# Altium PCB FRDMShieldTemplateProject.PcbDoc
Units mil, origin at the board's own origin, x right, y up, seen from the top; angles counter-clockwise.
Board outline 1990 x 2100 mil, 2 copper layers (Top Layer, Bottom Layer); 4 components, 0 nets, 64 pads, 0 vias.
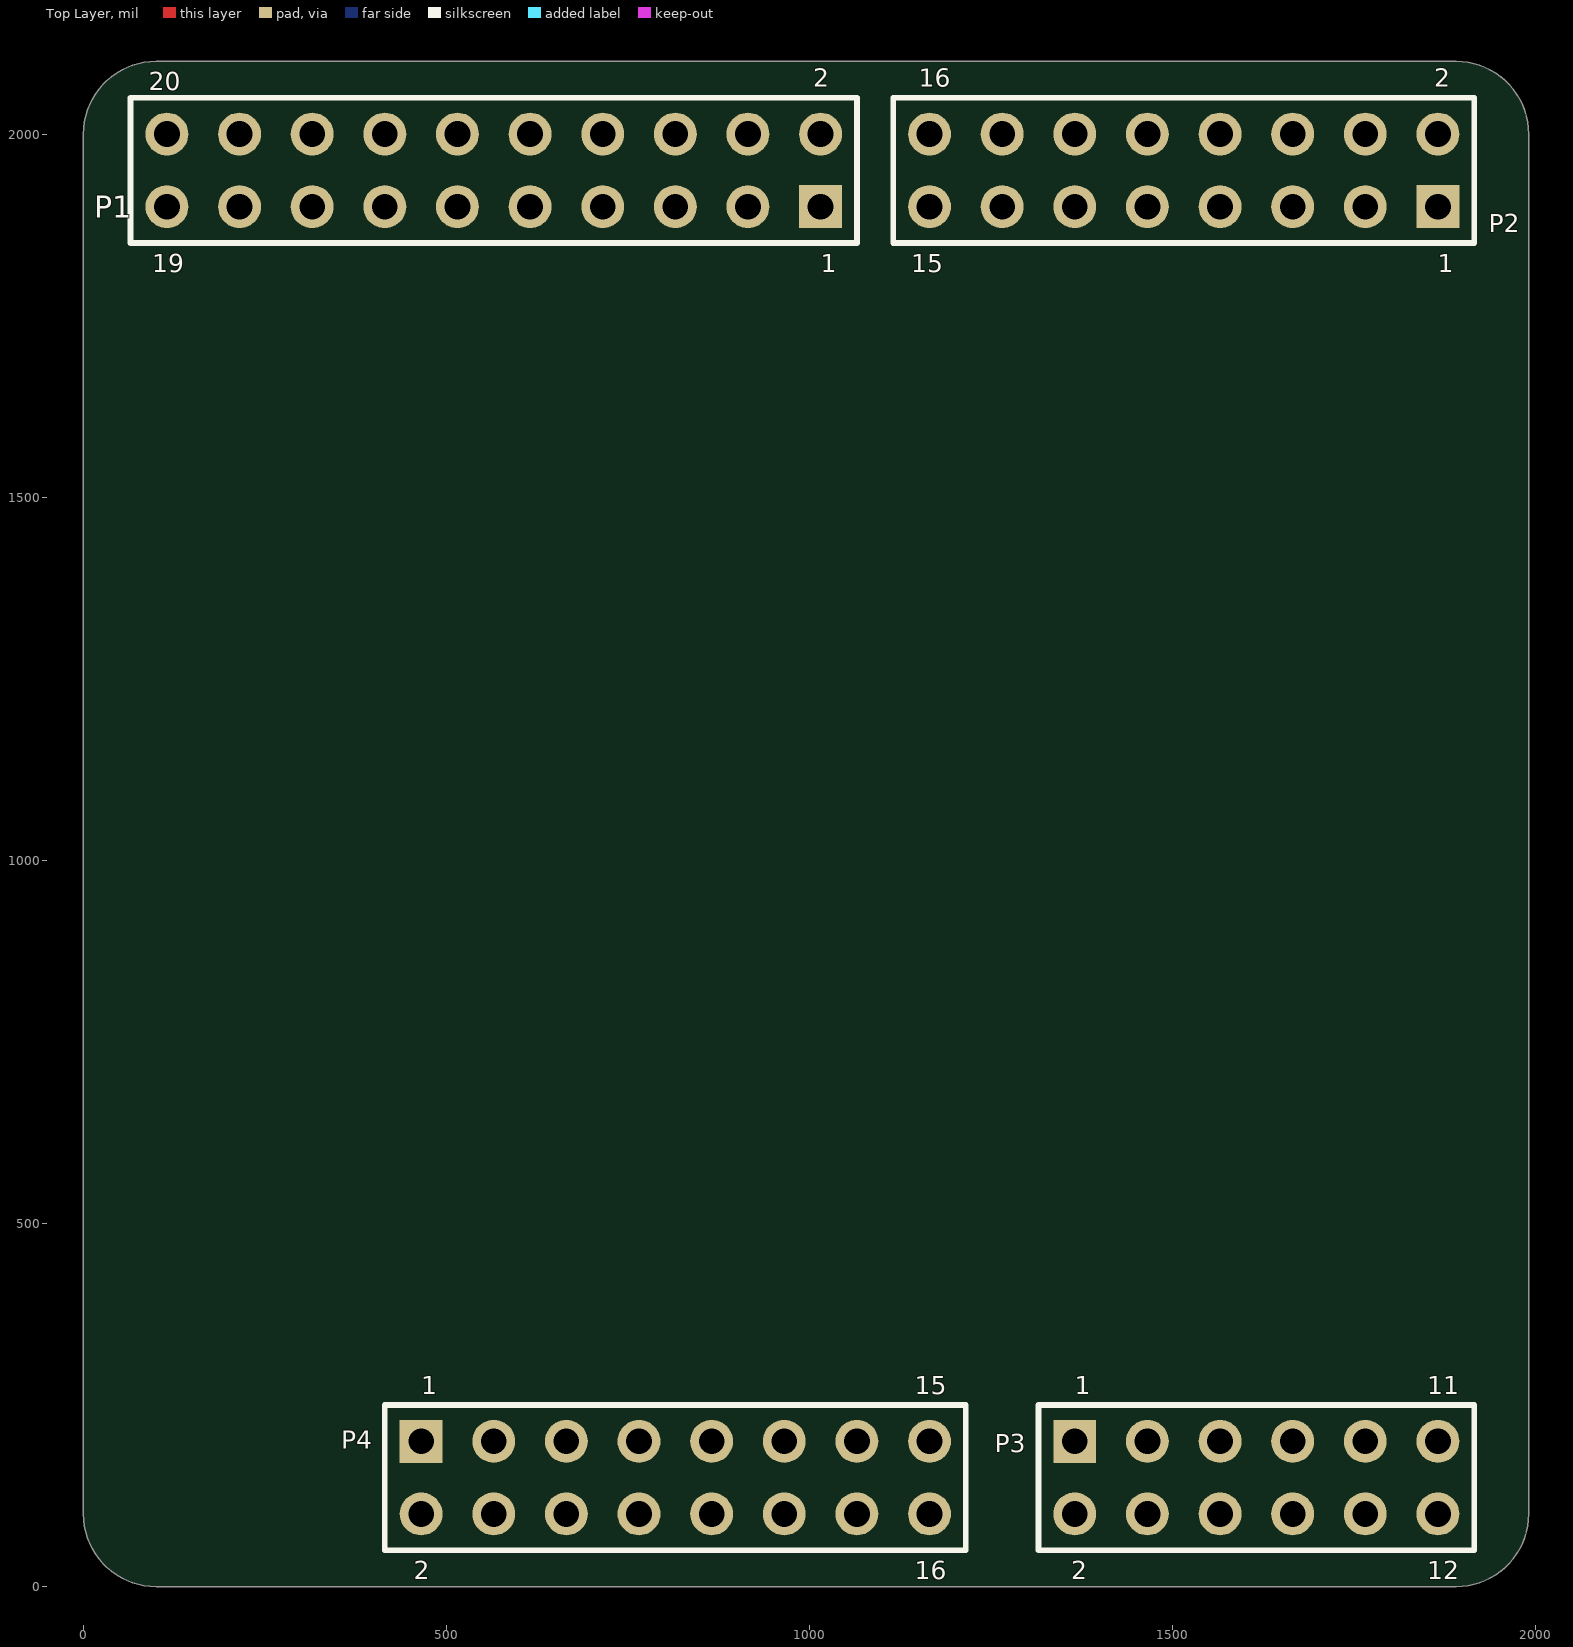
[diagram p0: Top Layer view]
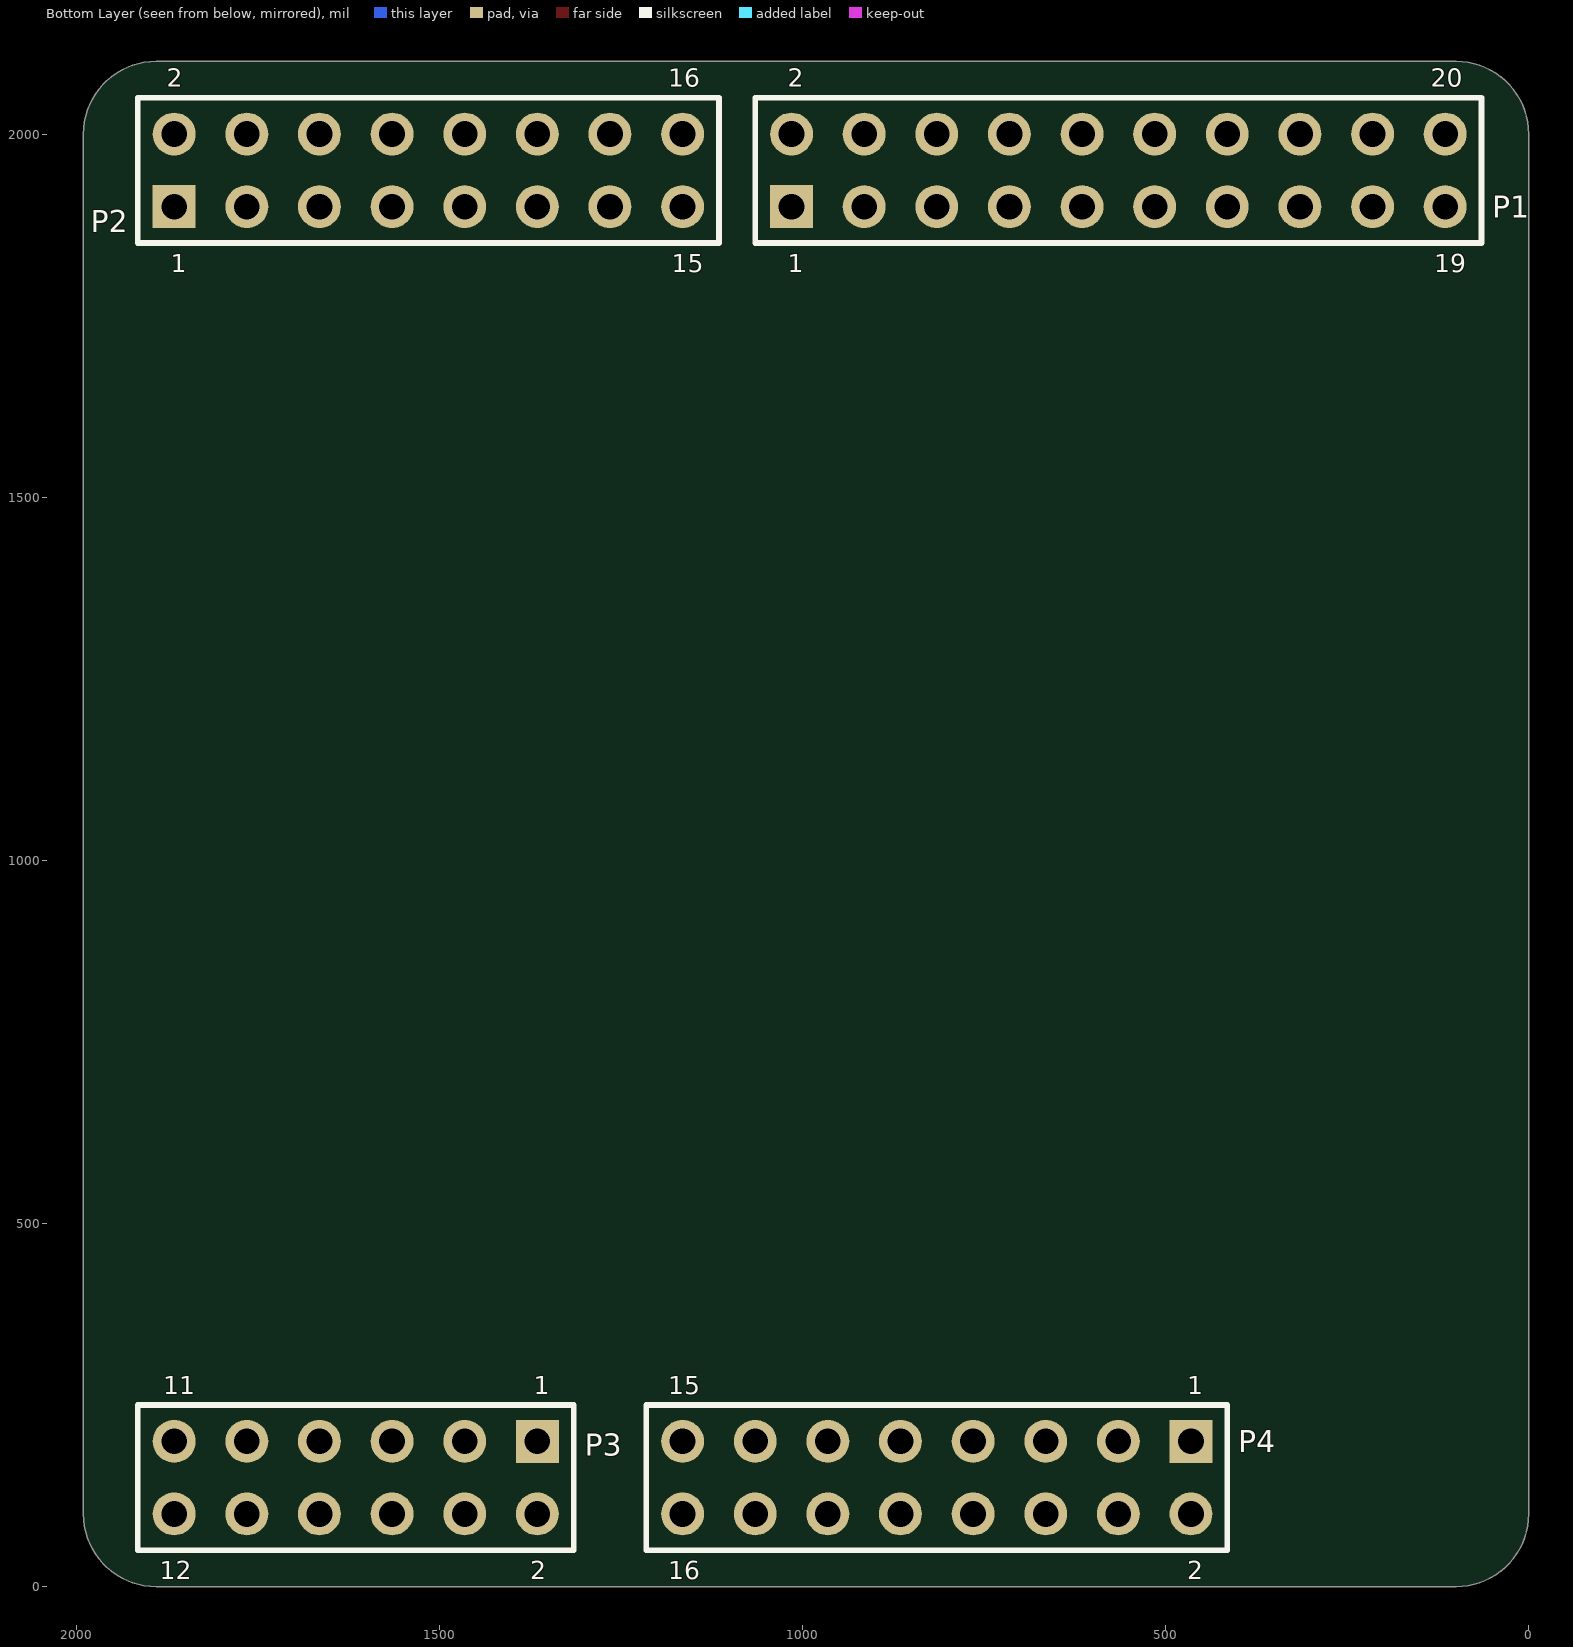
[diagram p1: Bottom Layer view, seen from below]

## Layer stack, top to bottom
Top Solder: solder mask 0.4, Solder Resist, Dk 3.5
Top Layer: signal copper 1.4
Dielectric 1: dielectric 12.6, FR-4, Dk 4.8
Bottom Layer: signal copper 1.4
Bottom Solder: solder mask 0.4, Solder Resist, Dk 3.5

## Board outline
0,1975 0,2000 cw(c100,2000) 100,2100 125,2100 1865,2100 1890,2100 cw(c1890,2000) 1990,2000 1990,1975 1990,125 1990,100 cw(c1890,100) 1890,0 1865,0 125,0 100,0 cw(c100,100) 0,100 0,125 0,1975

## Design rules (kind name [scope] priority, off if disabled: settings)
Clearance [All] p1: gap=6
HoleSize [All] p1: absolutevalues=TRUE maxlimit=125 minlimit=13 maxpercent=80.000 minpercent=20.000
MinimumSolderMaskSliver [All] p1: minsoldermaskwidth=1
PolygonConnect [All] p1: connectstyle=Relief reliefconductorwidth=10 reliefentries=4 polygonreliefangle="90 Angle" airgapwidth=10
RoutingVias [All] p1: holewidth=13 width=20 viastyle="Through Hole" minholewidth=13 minwidth=20 maxholewidth=125 maxwidth=250
SilkToSilkClearance [All] p1: silktosilkclearance=4
SilkToSolderMaskClearance [IsPad] p1: minsilkscreentomaskgap=6 clearancetoexposedcopper=TRUE
SolderMaskExpansion [All] p1: expansion=4
Width [All] p1: maxlimit=500 minlimit=6 preferedwidth=25
25 further rules are at their usual default settings.

## Components (designator, comment, footprint, x,y, rotation, side; value= is the part's Value field where it differs from the comment)
P1 "Header 10X2" HDR2X10 1015,1900 r180 bottom
P2 "" HDR2X8 1865,1900 r180 bottom
P3 "" HDR2X6 1365,200 r0 bottom
P4 "" HDR2X8 465,200 r0 bottom

## Footprints (in the part's own frame and the unit in brackets; to place one, negate y for a bottom-side part, rotate by r counter-clockwise, add the part's x,y. Pads: shape width x height; smd on the part's side, far side on the other; paste and mask are expansions set on the pad)
HDR2X6 [mm] "Connector; Header; 6x2 Position"
  rect 1.5x1.5 hole 0.9: 1(0,0)
  round 1.5 hole 0.9: 2(0,2.54) 3(2.54,0) 4(2.54,2.54) 5(5.08,0) 6(5.08,2.54) 7(7.62,0) 8(7.62,2.54) 9(10.16,0) 10(10.16,2.54) 11(12.7,0) 12(12.7,2.54)
  silkscreen extent -1.27,-1.27 13.97,3.81
HDR2X8 [mm] "Connector; Header; 8x2 Position"
  rect 1.5x1.5 hole 0.9: 1(0,0)
  round 1.5 hole 0.9: 2(0,2.54) 3(2.54,0) 4(2.54,2.54) 5(5.08,0) 6(5.08,2.54) 7(7.62,0) 8(7.62,2.54) 9(10.16,0) 10(10.16,2.54) 11(12.7,0) 12(12.7,2.54) 13(15.24,0) 14(15.24,2.54) 15(17.78,0) 16(17.78,2.54)
  silkscreen extent -1.27,-1.27 19.05,3.81
HDR2X10 [mm] "Connector; Header; 10x2 Position"
  rect 1.5x1.5 hole 0.9: 1(0,0)
  round 1.5 hole 0.9: 2(0,2.54) 3(2.54,0) 4(2.54,2.54) 5(5.08,0) 6(5.08,2.54) 7(7.62,0) 8(7.62,2.54) 9(10.16,0) 10(10.16,2.54) 11(12.7,0) 12(12.7,2.54) 13(15.24,0) 14(15.24,2.54) 15(17.78,0) 16(17.78,2.54) 17(20.32,0) 18(20.32,2.54) 19(22.86,0) 20(22.86,2.54)
  silkscreen extent -1.27,-1.27 24.13,3.81

## Part data
P1: "Header, 10-Pin, Dual row"
P2 P4: library part "Header 8X2", "Header, 8-Pin, Dual row"
P3: library part "Header 6X2", "Header, 6-Pin, Dual row"

## Nets (pads, with @x,y where several pads share a name; then routed paths per layer and width w, separated by ;. In a path a pad name is that pad's centre, name@x,y a point inside that pad or via, vN(x,y) a via of type N, cw(c..) or ccw(c..) an arc to the next point about the centre after c; other vN are vias at no path point)
pads on no net: P1.1 P1.2 P1.3 P1.4 P1.5 P1.6 P1.7 P1.8 P1.9 P1.10 P1.11 P1.12 P1.13 P1.14 P1.15 P1.16 P1.17 P1.18 P1.19 P1.20 P2.1 P2.2 P2.3 P2.4 P2.5 P2.6 P2.7 P2.8 P2.9 P2.10 P2.11 P2.12 P2.13 P2.14 P2.15 P2.16 P3.1 P3.2 P3.3 P3.4 P3.5 P3.6 P3.7 P3.8 P3.9 P3.10 P3.11 P3.12 P4.1 P4.2 P4.3 P4.4 P4.5 P4.6 P4.7 P4.8 P4.9 P4.10 P4.11 P4.12 P4.13 P4.14 P4.15 P4.16

## Polygon pours and split planes (outlines as drawn)
no net on Top Overlay (none): 415,250 415,50 1215,50 1215,250 415,250
no net on Top Overlay "Top Overlay-No Net" (none): 1315,50 1315,250 1915,250 1915,50 1315,50
no net on Top Overlay "Top Overlay-No Net" (none): 1915,1850 1915,2050 1115,2050 1115,1850 1915,1850
no net on Top Overlay "Top Overlay-No Net" (none): 1065,1850 1065,2050 65,2050 65,1850 1065,1850

## Silkscreen, mask and mechanical layers (free items; w line width, h text height)
Top Overlay:
  text "2" at 1005,2065 h25
  text "16" at 1150,2065 h25
  text "2" at 1860,2065 h25
  text "20" at 90,2060 h25
  text "P1" at 15,1885 h30
  text "P2" at 1935,1865 h25
  text "19" at 95,1810 h25
  text "1" at 1015,1810 h25
  text "15" at 1140,1810 h25
  text "1" at 1865,1810 h25
  text "1" at 465,265 h25
  text "15" at 1145,265 h25
  text "1" at 1365,265 h25
  text "11" at 1850,265 h25
  text "P4" at 355,190 h25
  text "P3" at 1255,185 h25
  text "2" at 455,10 h25
  text "16" at 1145,10 h25
  text "2" at 1360,10 h25
  text "12" at 1850,10 h25
Mechanical 1:
  lines w10: 0,98.83 ccw(c98.83,98.83) 98.83,0 1891.17,0 ccw(c1891.17,98.83) 1990,98.83 1990,2001.17 ccw(c1891.17,2001.17) 1891.17,2100 1865,2100 100,2100 ccw(c100,2000) 0,2000 0,98.83

## Text inside footprints (layer, text, board x,y; h text height)
P1: Bottom Overlay "2" at 1020,2065 h25; Bottom Overlay "1" at 1020,1810 h25; Bottom Overlay "19" at 130,1810 h25; Bottom Overlay "20" at 135,2065 h25
P2: Bottom Overlay "16" at 1185,2065 h25; Bottom Overlay "15" at 1180,1810 h25; Bottom Overlay "1" at 1870,1810 h25; Bottom Overlay "2" at 1875,2065 h25
P3: Bottom Overlay "2" at 1375,10 h25; Bottom Overlay "1" at 1370,265 h25; Bottom Overlay "11" at 1880,265 h25; Bottom Overlay "12" at 1885,10 h25
P4: Bottom Overlay "16" at 1185,10 h25; Bottom Overlay "15" at 1185,265 h25; Bottom Overlay "1" at 470,265 h25; Bottom Overlay "2" at 470,10 h25